# EAGLE board RoPi 2560 (EAGLE 6.5.0)
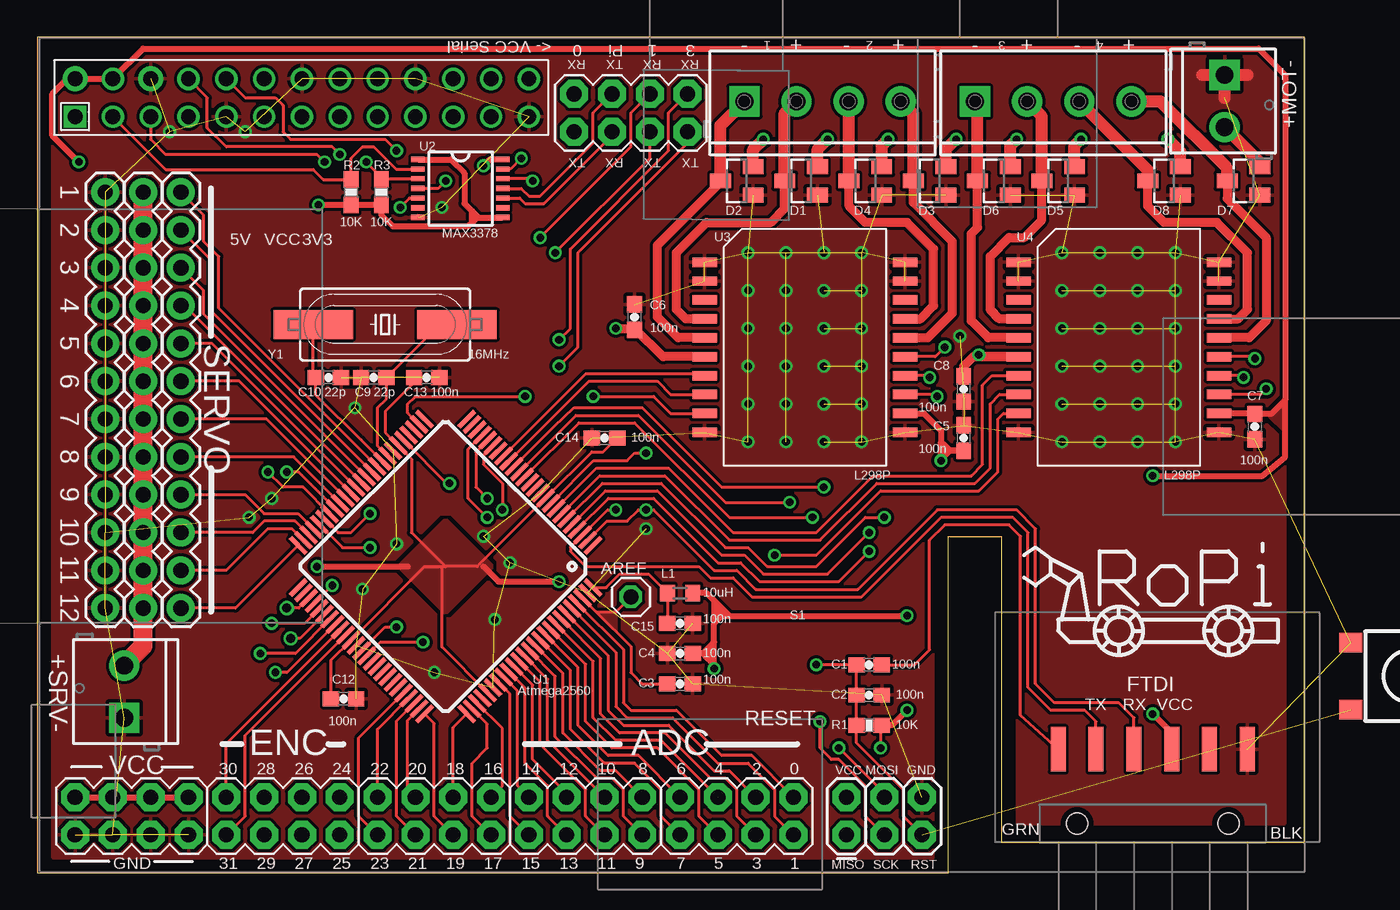
[diagram p0: board, top side]
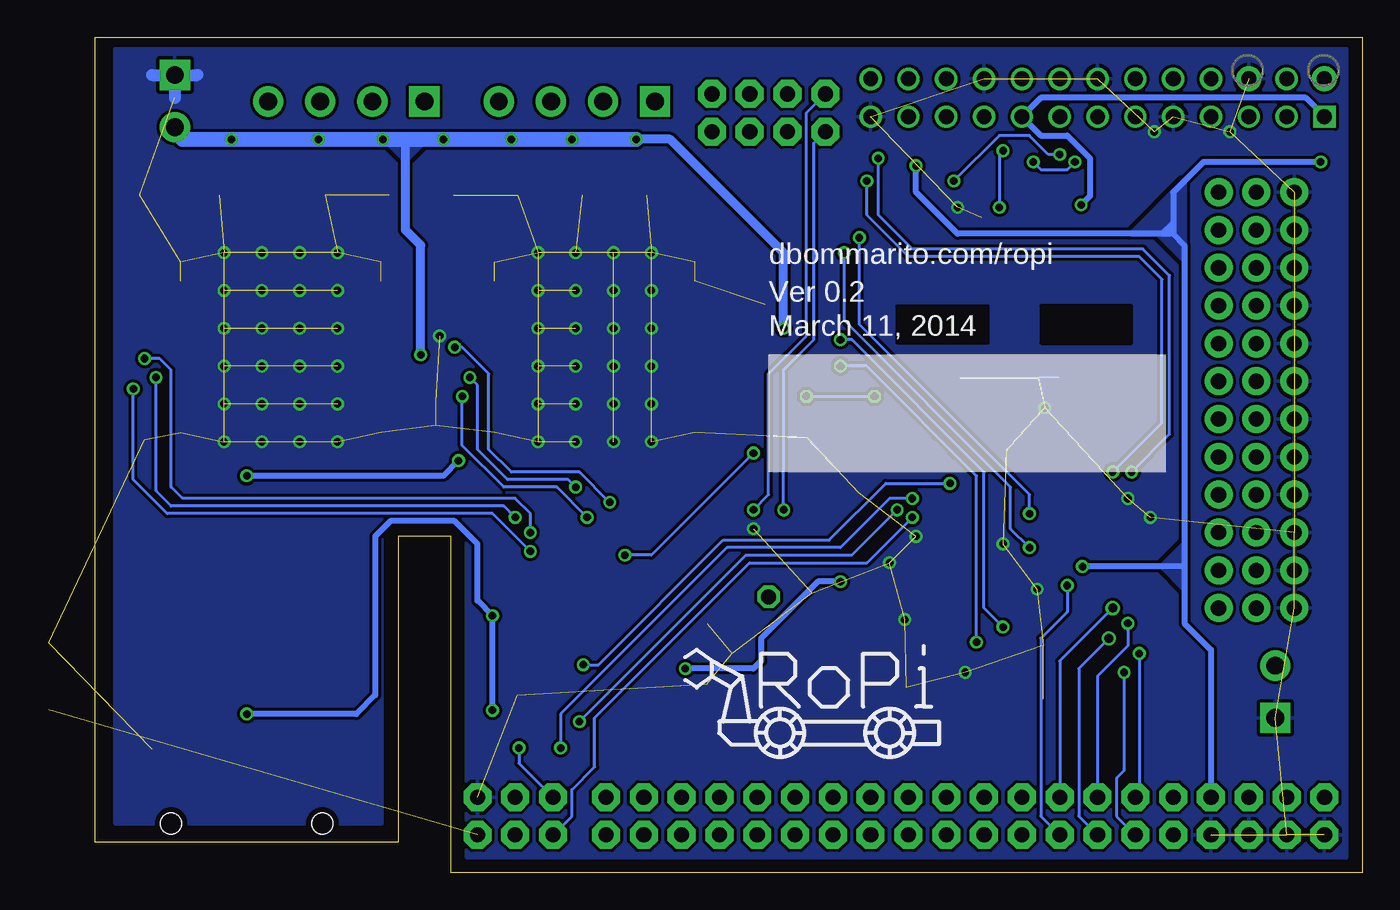
[diagram p1: board, bottom side, seen from below]

Size 85.09 x 56.13 mm. Coordinates in mm from the lower left corner, seen from the top.
Outline: 0,0 61.21,0 61.21,22.61 64.77,22.61 64.77,2.03 85.09,2.03 85.09,56.13 0,56.13 0,0
Copper layers (1*16): Top 0.0356mm / dielectric 1.5011mm / Bottom 0.0356mm
Design rules "OSHPark *": minimum track width 6mil, minimum drill 13mil, track to track 8mil, track to pad 8mil, pad to pad 8mil, via to via 8mil, smd to smd 8mil, copper to edge 15mil, drill to drill 6mil, minimum pad ring 7mil, minimum via ring 7mil, stop-mask expansion 3mil, vias tented up to drill 30mil, thermal gap 10mil

## Footprints (pad centres in the part's own frame; a part is rotated, then mirrored left to right if it is on the bottom)
2X4 = drill 1.016 pad 1.88 octagon: 1 -3.81,-1.27; 2 -3.81,1.27; 3 -1.27,-1.27; 4 -1.27,1.27; 5 1.27,-1.27; 6 1.27,1.27; 7 3.81,-1.27; 8 3.81,1.27
1X01 = drill 1.016 octagon: 1 0,0
0603-CAP = smd 1.1 x 1: 1 -0.85,0; 2 0.85,0
SOT23 = smd 1 x 1.4: 1 -0.95,-1.1; 2 0.95,-1.1; 3 0,1.1
2X3 = drill 1.016 pad 1.88 octagon: 1 0,0; 2 0,2.54; 3 2.54,0; 4 2.54,2.54; 5 5.08,0; 6 5.08,2.54
1X06-SMD = smd 1 x 3: 1 -6.35,5; 2 -3.81,5; 3 -1.27,5; 4 1.27,5; 5 3.81,5; 6 6.35,5 | hole 1.4: -5.08,0; 5.08,0
SCREWTERMINAL-3.5MM-2 = drill 1.2 pad 2.032 square: 1 0,0 | drill 1.2 pad 2.032: 2 3.5,0
SCREWTERMINAL-3.5MM-4 = drill 1.2 pad 2.032 square: 1 0,0 | drill 1.2 pad 2.032: 2 3.5,0; 3 7,0; 4 10.5,0
R0603 = smd 1 x 1.1: 1 -0.85,0; 2 0.85,0
RASPBERRY-PI = drill 1 square: 1 0,0 | drill 1 pad 1.676: 2 0,2.54; 6 5.08,2.54 | drill 1: 3 2.54,0; 4 2.54,2.54; 5 5.08,0; 7 7.62,0; 8 7.62,2.54; 9 10.16,0; 10 10.16,2.54; 11 12.7,0; 12 12.7,2.54; 13 15.24,0; 14 15.24,2.54; 15 17.78,0; 16 17.78,2.54; 17 20.32,0; 18 20.32,2.54; 19 22.86,0; 20 22.86,2.54; 21 25.4,0; 22 25.4,2.54; 23 27.94,0; 24 27.94,2.54; 25 30.48,0; 26 30.48,2.54
0603-RES = smd 1.1 x 1: 1 -0.85,0; 2 0.85,0
TACTILE_SWITCH_TALL = smd 1.55 x 1.3: A1 -3.975,-2.25; A2 3.975,-2.25; B1 -3.975,2.25; B2 3.975,2.25
1X12 = drill 1.016 pad 1.88: 1 0,0; 2 2.54,0; 3 5.08,0; 4 7.62,0; 5 10.16,0; 6 12.7,0; 7 15.24,0; 8 17.78,0; 9 20.32,0; 10 22.86,0; 11 25.4,0; 12 27.94,0
TQFP100 = smd 1.5 x 0.3: 1 -8,6; 2 -8,5.5; 3 -8,5; 4 -8,4.5; 5 -8,4; 6 -8,3.5; 7 -8,3; 8 -8,2.5; 9 -8,2; 10 -8,1.5; 11 -8,1; 12 -8,0.5; 13 -8,0; 14 -8,-0.5; 15 -8,-1; 16 -8,-1.5; 17 -8,-2; 18 -8,-2.5; 19 -8,-3; 20 -8,-3.5; 21 -8,-4; 22 -8,-4.5; 23 -8,-5; 24 -8,-5.5; 25 -8,-6; 51 8,-6; 52 8,-5.5; 53 8,-5; 54 8,-4.5; 55 8,-4; 56 8,-3.5; 57 8,-3; 58 8,-2.5; 59 8,-2; 60 8,-1.5; 61 8,-1; 62 8,-0.5; 63 8,0; 64 8,0.5; 65 8,1; 66 8,1.5; 67 8,2; 68 8,2.5; 69 8,3; 70 8,3.5; 71 8,4; 72 8,4.5; 73 8,5; 74 8,5.5; 75 8,6 | smd 0.3 x 1.5: 26 -6,-8; 27 -5.5,-8; 28 -5,-8; 29 -4.5,-8; 30 -4,-8; 31 -3.5,-8; 32 -3,-8; 33 -2.5,-8; 34 -2,-8; 35 -1.5,-8; 36 -1,-8; 37 -0.5,-8; 38 0,-8; 39 0.5,-8; 40 1,-8; 41 1.5,-8; 42 2,-8; 43 2.5,-8; 44 3,-8; 45 3.5,-8; 46 4,-8; 47 4.5,-8; 48 5,-8; 49 5.5,-8; 50 6,-8; 76 6,8; 77 5.5,8; 78 5,8; 79 4.5,8; 80 4,8; 81 3.5,8; 82 3,8; 83 2.5,8; 84 2,8; 85 1.5,8; 86 1,8; 87 0.5,8; 88 0,8; 89 -0.5,8; 90 -1,8; 91 -1.5,8; 92 -2,8; 93 -2.5,8; 94 -3,8; 95 -3.5,8; 96 -4,8; 97 -4.5,8; 98 -5,8; 99 -5.5,8; 100 -6,8
TSSOP14 = smd 0.9 x 0.35: 1 -2.875,1.95; 2 -2.875,1.3; 3 -2.875,0.65; 4 -2.875,0; 5 -2.875,-0.65; 6 -2.875,-1.3; 7 -2.875,-1.95; 8 2.825,-1.95; 9 2.825,-1.3; 10 2.825,-0.65; 11 2.825,0; 12 2.825,0.65; 13 2.825,1.3; 14 2.825,1.95
POWERSO20 = smd 1.651 x 0.635: 1 -6.731,5.715; 2 -6.731,4.445; 3 -6.731,3.175; 4 -6.731,1.905; 5 -6.731,0.635; 6 -6.731,-0.635; 7 -6.731,-1.905; 8 -6.731,-3.175; 9 -6.731,-4.445; 10 -6.731,-5.715; 11 6.731,-5.715; 12 6.731,-4.445; 13 6.731,-3.175; 14 6.731,-1.905; 15 6.731,-0.635; 16 6.731,0.635; 17 6.731,1.905; 18 6.731,3.175; 19 6.731,4.445; 20 6.731,5.715
HC49UP = smd 5.334 x 1.93: 1 -4.826,0; 2 4.826,0

## Placement (x,y rotation side)
ADC1  M04X2  [2X4]  46.99,3.81 180 top
ADC2  M04X2  [2X4]  36.83,3.81 180 top
AREF  [1X01]  39.88,18.54 0 top
C1  100n  [0603-CAP]  55.88,13.97 0 top
C2  100n  [0603-CAP]  55.88,11.94 0 top
C3  100n  [0603-CAP]  43.18,12.7 180 top
C4  100n  [0603-CAP]  43.18,14.73 180 top
C5  100n  [0603-CAP]  62.23,29.21 270 top
C6  100n  [0603-CAP]  40.13,37.34 90 top
C7  100n  [0603-CAP]  81.79,29.97 90 top
C8  100n  [0603-CAP]  62.23,32.51 270 top
C9  22p  [0603-CAP]  22.61,33.27 180 top
C10  22p  [0603-CAP]  19.56,33.27 0 top
C12  100n  [0603-CAP]  20.57,11.68 0 top
C13  100n  [0603-CAP]  26.16,33.27 0 top
C14  100n  [0603-CAP]  38.1,29.21 180 top
C15  100n  [0603-CAP]  43.18,16.76 0 top
D1  BAS40-04  [SOT23]  51.31,46.48 90 top
D2  BAS40-04  [SOT23]  46.99,46.48 90 top
D3  BAS40-04  [SOT23]  59.94,46.48 90 top
D4  BAS40-04  [SOT23]  55.63,46.48 90 top
D5  BAS40-04  [SOT23]  68.58,46.48 90 top
D6  BAS40-04  [SOT23]  64.26,46.48 90 top
D7  BAS40-04  [SOT23]  81.03,46.48 90 top
D8  BAS40-04  [SOT23]  75.69,46.48 90 top
DIG1  M04X2  [2X4]  26.67,3.81 180 top
J1  AVR_SPI_PRG_6PTH  [2X3]  54.36,2.54 0 top
JP1  [1X06-SMD]  74.93,3.3 0 top
JP2  M023.5MM  [SCREWTERMINAL-3.5MM-2]  79.76,53.59 270 top
JP3  M023.5MM  [SCREWTERMINAL-3.5MM-2]  5.84,10.41 90 top
JP4  [SCREWTERMINAL-3.5MM-4]  47.5,51.82 0 top
JP5  [SCREWTERMINAL-3.5MM-4]  62.99,51.82 0 top
L1  10uH  [R0603]  43.18,18.8 0 top
PI  RASPBERRY-PI  [RASPBERRY-PI]  2.54,50.8 0 top
R1  10K  [0603-RES]  55.88,9.91 0 top
R2  10K  [0603-RES]  21.08,45.72 270 top
R3  10K  [0603-RES]  23.11,45.72 270 top
S1  SWITCH-MOMENTARY-2SMD-4  [TACTILE_SWITCH_TALL]  92.2,13.21 180 top  (outside the outline)
SRV  SrvSig  [1X12]  9.65,45.72 270 top
SRV1  SrvGnd  [1X12]  4.57,45.72 270 top
SRV2  SrvPwr  [1X12]  7.11,45.72 270 top
U1  ATMEGA2560AU  [TQFP100]  27.43,20.57 225 top
U2  MAX3378EEUD  [TSSOP14]  28.45,45.97 0 top
U3  L298_BRIDGE_DRIVER  [POWERSO20]  51.56,35.31 0 top
U4  L298_BRIDGE_DRIVER  [POWERSO20]  72.64,35.31 0 top
U$1  M04X2  [2X4]  39.88,51.05 0 top
U$2  M04X2  [2X4]  6.35,3.81 180 top
U$3  M04X2  [2X4]  16.51,3.81 180 top
Y1  16M  [HC49UP]  23.37,36.83 180 top

## Library data of the parts
ADC1 ADC2 DIG1 J1 JP1-JP5 SRV SRV1 SRV2 U$1-U$3 = SparkFun-Connectors
AREF = pinhead
C1-C10 C12-C15 R1-R3 = SparkFun-Passives
D1-D8 = diode
L1 = dab5267
PI = RaspberryPi
S1 = SparkFun-Electromechanical
U1 = SparkFun-DigitalIC
U2 = max3378e
U3 U4 = SparkFun-PowerIC
Y1 = SparkFun-FreqCtrl

## Nets
3.3V: PI.1 PI.17 R2.2 R3.2 U2.1 U2.8
5V: C4.1 C5.2 C7.2 C12.1 C13.1 C14.1 J1.2 JP1.4 L1.2 PI.2 PI.4 R1.2 U1.10 U1.31 U1.61 U1.80 U2.14 U3.12 U4.12 U$2.1 U$2.3 U$2.5 U$2.7
A0: ADC1.1 U1.97
A1: ADC1.2 U1.96
A2: ADC1.3 U1.95
A3: ADC1.4 U1.94
A4: ADC1.5 U1.93
A5: ADC1.6 U1.92
A6: ADC1.7 U1.91
A7: ADC1.8 U1.90
A8: ADC2.1 U1.89
A9: ADC2.2 U1.88
A10: ADC2.3 U1.87
A11: ADC2.4 U1.86
A12: ADC2.5 U1.85
A13: ADC2.6 U1.84
A14: ADC2.7 U1.83
A15: ADC2.8 U1.82
AREF: AREF.1 C3.2 U1.98
AVR_SCL: U1.43 U2.12
AVR_SDA: U1.44 U2.13
DTR: C1.2 JP1.1
ENC1A: U1.53 U$3.1
ENC1B: U1.54 U$3.2
ENC2A: U1.55 U$3.3
ENC2B: U1.56 U$3.4
ENC3A: U1.57 U$3.5
ENC3B: U1.58 U$3.6
ENC4A: U1.59 U$3.7
ENC4B: U1.60 U$3.8
GND: C2.2 C3.1 C4.2 C5.1 C6.2 C7.1 C8.2 C9.2 C10.2 C12.2 C13.2 C14.2 C15.2 D1.1 D2.1 D3.1 D4.1 D5.1 D6.1 D7.1 D8.1 J1.6 JP1.6 JP2.1 JP3.1 PI.6 PI.9 PI.14 PI.20 PI.25 S1.A2 SRV1.1 SRV1.2 SRV1.3 SRV1.4 SRV1.5 SRV1.6 SRV1.7 SRV1.8 SRV1.9 SRV1.10 SRV1.11 SRV1.12 U1.11 U1.32 U1.62 U1.81 U1.99 U2.7 U3.1 U3.2 U3.10 U3.11 U3.19 U3.20 U4.1 U4.2 U4.10 U4.11 U4.19 U4.20 U$2.2 U$2.4 U$2.6 U$2.8
GPIO0: DIG1.1 U1.78
GPIO1: DIG1.2 U1.77
GPIO2: DIG1.3 U1.76
GPIO3: DIG1.4 U1.75
GPIO4: DIG1.5 U1.74
GPIO5: DIG1.6 U1.73
GPIO6: DIG1.7 U1.72
GPIO7: DIG1.8 U1.71
MISO: J1.1 U1.22
MOSI: J1.4 U1.21
MOT1+: D1.3 JP4.2 U3.4
MOT1-: D2.3 JP4.1 U3.5
MOT1_A: U1.18 U3.7
MOT1_B: U1.27 U3.9
MOT1_PWM: U1.17 U3.8
MOT2+: D3.3 JP4.4 U3.16
MOT2-: D4.3 JP4.3 U3.17
MOT2_A: U1.14 U3.13
MOT2_B: U1.15 U3.15
MOT2_PWM: U1.16 U3.14
MOT3+: D5.3 JP5.2 U4.4
MOT3-: D6.3 JP5.1 U4.5
MOT3_A: U1.8 U4.7
MOT3_B: U1.9 U4.9
MOT3_PWM: U1.7 U4.8
MOT4+: D7.3 JP5.4 U4.16
MOT4-: D8.3 JP5.3 U4.17
MOT4_A: U1.4 U4.13
MOT4_B: U1.5 U4.15
MOT4_PWM: U1.6 U4.14
N$1: JP3.2 SRV2.1 SRV2.2 SRV2.3 SRV2.4 SRV2.5 SRV2.6 SRV2.7 SRV2.8 SRV2.9 SRV2.10 SRV2.11 SRV2.12
N$2: C15.1 L1.1 U1.100
PI_5V_RX: U2.10 U$1.3
PI_5V_TX: U2.11 U$1.4
PI_RX: PI.10 U2.5
PI_SCL: PI.5 R3.1 U2.3
PI_SDA: PI.3 R2.1 U2.2
PI_TX: PI.8 U2.4
RST: C1.1 C2.1 J1.5 R1.1 S1.B2 U1.30
RX0: JP1.3 U1.2 U$1.2
RX1: U1.45 U$1.6
RX3: U1.63 U$1.8
SCK: J1.3 U1.20
SERVO1: SRV.1 U1.35
SERVO2: SRV.2 U1.36
SERVO3: SRV.3 U1.37
SERVO4: SRV.4 U1.38
SERVO5: SRV.5 U1.39
SERVO6: SRV.6 U1.40
SERVO7: SRV.7 U1.41
SERVO8: SRV.8 U1.42
SERVO9: SRV.9 U1.47
SERVO10: SRV.10 U1.48
SERVO11: SRV.11 U1.49
SERVO12: SRV.12 U1.50
TX0: JP1.2 U1.3 U$1.1
TX1: U1.46 U$1.5
TX3: U1.64 U$1.7
V_BATT: C6.1 C8.1 D1.2 D2.2 D3.2 D4.2 D5.2 D6.2 D7.2 D8.2 JP2.2 U3.6 U4.6
XTAL1: C10.1 U1.34 Y1.2
XTAL2: C9.1 U1.33 Y1.1

## Tracks (layer width: path | path; a pad name or v marks a point on that pad's centre or on a via)
3.3V  (via drill 0.51)
  Top 0.406: U2.1 27.77,47.92 28.7,46.99 28.7,44.96 29.21,44.45 | 29.21,44.45 29.64,44.02 | 29.64,44.02 U2.8 | 29.21,43.69 28.96,43.43 23.88,43.43 23.11,44.2 R3.2 R2.2 19.81,44.87 v18.88,44.87 | 29.21,43.69 29.55,44.02 29.64,44.02 | 29.21,43.69 29.21,44.45
  Bottom 0.406: PI.1 3.81,52.07 21.59,52.07 PI.17 21.59,49.53 19.81,49.53 18.29,48.01 18.29,45.47 v18.88,44.87
5V  (via drill 0.51)
  Top 0.203: 27.43,20.57 25.15,22.86 25.15,27.81 U1.31 23.37,29.59 23.37,30.99 25.31,32.93 C13.1 | U1.80 27.18,15.17 27.18,20.57 | 27.43,20.57 26.02,20.57 U1.61 19.72,14.28 C12.1 | 27.43,20.57 29.55,20.57 U1.10 37.25,28.27 38.01,28.27 C14.1 | R1.2 56.64,9.82 v56.64,8.38
  Top 0.406: U4.12 81.75,30.86 C7.2 82.89,30.82 83.82,31.75 | 83.82,31.75 83.82,53.59 82.04,55.37 7.11,55.37 PI.4 PI.2 2.03,53.34 1.02,52.32 1.02,49.53 v2.79,47.75 | U3.12 59.56,30.86 60.71,29.72 60.71,28.96 | 60.96,28.7 61.3,28.36 | 61.3,28.36 C5.2 61.38,28.36 arc90 v60.71,27.69 | 61.3,28.36 60.71,27.76 v60.71,27.69 | v60.71,27.69 60.71,28.96 | 60.71,28.96 60.96,28.7 | 60.96,28.7 60.96,28.19 | v74.93,26.67 82.3,26.67 83.82,27.94 83.82,31.75 | 45.47,18.29 44.96,18.8 L1.2 | 45.47,18.29 45.47,17.53 | 45.47,17.53 45.47,16.76 | 45.47,15.49 45.21,15.24 | 44.96,14.99 44.7,14.73 | 45.47,15.49 45.47,16.76 | 45.47,16.76 45.72,17.02 | 45.97,17.27 46.48,17.27 | 46.48,17.27 v58.42,17.27 | 46.48,17.27 45.72,18.03 | 45.47,18.29 45.72,18.03 | 45.72,18.03 45.72,17.02 | 45.72,17.02 45.97,17.27 | 45.97,17.27 45.97,17.53 45.47,17.53 | v74.93,10.67 76.2,9.4 JP1.4 | v45.47,13.72 45.47,13.97 | 45.47,13.97 45.47,15.49 | 29.97,20.57 30.99,19.56 v35.05,19.56 | 44.7,14.73 44.96,14.48 | 44.96,14.48 45.21,14.22 | 45.47,13.97 45.21,14.22 | 45.21,14.22 45.21,15.24 | 45.21,15.24 44.96,14.99 | 44.96,14.99 44.96,14.48 | U$2.7 U$2.5 U$2.3 U$2.1 | v18.8,20.57 24.89,20.57 | U2.14 30.4,47.92 v29.97,47.5 | v58.42,10.92 57.4,9.91 R1.2 | 44.7,14.73 C4.1
  Bottom 0.203: v56.64,8.38 56.64,7.37 J1.2
  Bottom 0.406: v60.71,27.69 61.72,26.67 v74.93,26.67 | v58.42,10.92 v58.42,17.27 59.44,18.29 59.44,22.1 60.96,23.62 65.28,23.62 66.29,22.61 66.29,11.94 67.56,10.67 v74.93,10.67 | v35.05,19.56 36.58,19.56 40.39,15.75 40.39,14.22 40.89,13.72 v45.47,13.72 | 12.7,42.93 11.94,42.16 11.94,20.57 | 11.94,20.57 11.94,16.76 10.16,14.99 U$2.1 | 11.94,20.57 v18.8,20.57 | 12.7,42.93 12.95,42.93 | 13.46,42.93 27.18,42.93 29.97,45.72 v29.97,47.5 | v2.79,47.75 10.67,47.75 12.7,45.72 12.7,43.69 | 12.7,43.69 12.7,42.93 | 12.7,43.69 13.46,42.93 | 13.46,42.93 12.95,42.93 | 12.95,42.93 12.95,43.18
  pour Top: 82.8,30.73 83.82,29.72 83.82,31.5 83.82,31.75
  pour Bottom: 11.94,46.48 15.49,42.93 13.72,42.93 11.94,41.15
  pour Bottom: 13.46,20.57 11.94,22.1 11.94,19.05
  pour Top: 27.43,23.62 24.38,20.57 27.43,17.53 30.48,20.57
A0
  Top 0.203: ADC1.1 48.01,7.87 45.97,7.87 42.93,10.92 39.88,10.92 39.37,11.43 39.37,15 U1.97
A1
  Top 0.203: U1.96 38.86,14.8 38.86,11.18 39.62,10.41 42.67,10.41 45.72,7.37 47.75,7.37 49.53,5.59 49.53,3.81 ADC1.2
A2
  Top 0.203: U1.95 38.35,14.6 38.35,10.92 39.37,9.91 42.42,9.91 45.47,6.86 46.48,6.86 ADC1.3
A3
  Top 0.203: ADC1.4 46.99,3.81 46.99,5.59 46.23,6.35 45.21,6.35 42.16,9.4 39.12,9.4 37.85,10.67 37.85,14.4 U1.94
A4  (1 unrouted)
  Top 0.203: 45.72,5.06 41.91,8.89 38.86,8.89 37.34,10.41 37.34,14.2 U1.93
A5
  Top 0.203: ADC1.6 44.45,3.81 44.45,5.59 41.66,8.38 38.61,8.38 36.83,10.16 36.83,14 U1.92
A6
  Top 0.203: ADC1.7 40.39,7.87 38.35,7.87 36.32,9.91 36.32,13.8 U1.91
A7
  Top 0.203: ADC1.8 41.91,3.81 41.91,5.59 40.13,7.37 38.1,7.37 35.81,9.65 35.81,13.61 U1.90
A8
  Top 0.203: ADC2.1 38.86,6.86 37.85,6.86 35.31,9.4 35.31,13.41 U1.89
A9
  Top 0.203: ADC2.2 39.37,3.81 39.37,5.59 38.61,6.35 37.59,6.35 34.8,9.14 34.8,13.21 U1.88
A10
  Top 0.203: ADC2.3 34.29,8.89 34.29,13.01 U1.87
A11
  Top 0.203: ADC2.4 36.83,3.81 36.83,5.59 33.78,8.64 33.78,12.81 U1.86
A12
  Top 0.203: ADC2.5 35.56,5.33 33.27,7.62 33.27,12.61 U1.85
A13
  Top 0.203: ADC2.6 34.29,3.81 34.29,5.84 32.77,7.37 32.77,12.41 U1.84
A14
  Top 0.203: ADC2.7 32.26,5.84 32.26,12.21 U1.83
A15
  Top 0.203: ADC2.8 31.75,3.81 31.75,12.01 U1.82
AREF
  Top 0.203: 37.55,17.53 39.88,15.2 39.88,13.46 40.64,12.7 C3.2 | U1.98 37.55,17.53 | AREF.1 38.86,17.53 37.55,17.53
  pour Top: 37.59,17.53 38.86,17.53 38.86,16.26
AVR_SCL  (via drill 0.51)
  Top 0.203: U1.43 17.55,26.92 v16.76,26.92 | v33.27,46.48 33.16,46.62 U2.12
  Bottom 0.203: v16.76,26.92 13.46,30.23 13.46,39.88 14.99,41.4 30.48,41.4 33.27,44.2 v33.27,46.48
AVR_SDA  (via drill 0.51)
  Top 0.203: U1.44 17.86,25.91 16.51,25.91 v15.49,26.92 | v32.51,48.01 31.78,47.27 U2.13
  Bottom 0.203: v15.49,26.92 12.95,29.46 12.95,40.13 14.73,41.91 30.23,41.91 32.51,44.2 v32.51,48.01
DTR
  Top 0.203: JP1.1 66.04,10.59 66.04,22.61 65.28,23.37 60.96,23.37 59.94,22.35 59.94,14.99 58.93,13.97 C1.2
ENC1A  (via drill 0.6)
  Top 0.203: U1.53 17.57,17.78 v16.76,17.78
  Bottom 0.203: v16.76,17.78 20.32,14.22 U$3.1
ENC1B  (via drill 0.51)
  Top 0.203: U1.54 19.8,19.3 v19.81,19.3
  Bottom 0.203: v19.81,19.3 19.81,17.53 21.59,15.75 21.59,3.81 U$3.2
ENC2A  (via drill 0.51)
  Top 0.203: U1.55 17.96,16.76 v15.75,16.76
  Bottom 0.203: v15.75,16.76 15.75,15.24 17.78,13.21 U$3.3
ENC2B  (via drill 0.6)
  Top 0.203: U1.56 17.66,15.75 v17.02,15.75
  Bottom 0.203: v17.02,15.75 19.05,13.72 19.05,3.81 U$3.4
ENC3A  (via drill 0.51)
  Top 0.203: U1.57 17.35,14.73 v14.99,14.73
  Bottom 0.203: v14.99,14.73 14.99,5.33 U$3.5
ENC3B  (via drill 0.51)
  Top 0.203: U1.58 16.78,13.46 v16,13.46
  Bottom 0.203: v16,13.46 16,6.86 16.51,6.35 16.51,3.81 U$3.6
ENC4A
  Top 0.203: U$3.7 12.7,8.67 U1.59
ENC4B
  Top 0.203: U$3.8 13.97,3.81 13.97,9.23 U1.60
GND  (via drill 0.51)  (126 unrouted)
  Top 0.813: JP2.1 78.23,53.59 | 81.28,53.59 JP2.1 | 79.76,52.07 JP2.1
  Bottom 0.813: JP2.1 78.23,53.59 | 81.28,53.59 JP2.1 | JP2.1 79.76,52.07
  other vias: 61.98,36.07 47.75,41.66 50.29,41.66 52.83,41.66 55.37,41.66 55.37,39.12 52.83,39.12 50.29,39.12 47.75,39.12 47.75,36.58 50.29,36.58 52.83,36.58 55.37,36.58 55.37,34.04 52.83,34.04 50.29,34.04 47.75,34.04 47.75,31.5 50.29,31.5 52.83,31.5 55.37,31.5 55.37,28.96 52.83,28.96 50.29,28.96 47.75,28.96 68.83,28.96 71.37,28.96 73.91,28.96 76.45,28.96 76.45,31.5 73.91,31.5 71.37,31.5 68.83,31.5 68.83,34.04 71.37,34.04 73.91,34.04 76.45,34.04 76.45,36.58 73.91,36.58 71.37,36.58 68.83,36.58 68.83,39.12 71.37,39.12 73.91,39.12 76.45,39.12 76.45,41.66 73.91,41.66 71.37,41.66 68.83,41.66 29.97,22.61 24.13,22.1 21.34,31.24 27.18,44.7 13.97,49.78 8.89,49.78 14.22,23.88 15.75,25.15 40.89,23.11 21.84,19.05 26.67,13.46 30.73,17.02 31.75,20.83
  pour Bottom (isolate 0, rank 6): 1.02,55.37 83.82,55.37 83.82,3.3 65.79,3.3 65.79,23.37 60.2,23.37 60.2,1.02 1.02,1.02
  pour Top (isolate 0, rank 6): 1.02,55.37 1.02,1.02 60.2,1.02 60.2,23.37 65.79,23.37 65.79,3.3 83.82,3.3 83.82,55.37
GPIO0
  Top 0.203: DIG1.1 31.24,5.84 31.24,9.69 U1.78
GPIO1
  Top 0.203: DIG1.2 29.21,3.81 29.21,7.37 30.23,8.38 30.23,10 U1.77
GPIO2
  Top 0.203: DIG1.3 27.94,9.77 U1.76
GPIO3
  Top 0.203: DIG1.4 26.67,3.81 26.67,10.02 U1.75
GPIO4
  Top 0.203: DIG1.5 24.89,5.59 24.89,10.26 U1.74
GPIO5
  Top 0.203: DIG1.6 24.13,3.81 24.13,10.2 U1.73
GPIO6
  Top 0.203: DIG1.7 22.86,9.64 U1.72
GPIO7
  Top 0.203: DIG1.8 21.59,3.81 21.59,9.07 U1.71
MISO  (via drill 0.51)
  Top 0.203: v30.23,23.88 28.96,25.15 28.96,28.46 U1.22
  Bottom 0.203: J1.1 53.09,3.81 53.09,5.59 51.56,7.11 51.56,10.41 41.15,20.83 33.27,20.83 v30.23,23.88
MOSI  (via drill 0.51)
  Top 0.203: U1.21 29.46,28.26 29.46,25.91 v30.23,25.15 | v53.85,8.38 56.9,5.33 J1.4
  Bottom 0.203: v30.23,25.15 31.75,25.15 35.05,21.84 42.67,21.84 53.85,10.67 v53.85,8.38
MOT1+
  Top 0.61: U3.4 43.56,37.21 42.93,37.85 42.93,41.66 44.96,43.69 49.28,43.69 50.21,44.62 D1.3
  Top 0.813: D1.3 50.21,51.03 JP4.2
MOT1-
  Top 0.61: U3.5 43.05,35.94 41.66,37.34 41.66,42.16 45.89,46.4
  Top 0.813: JP4.1 45.89,50.21 D2.3 45.89,46.4
MOT1_A
  Top 0.203: U1.18 36.85,33.53 44.7,33.53 U3.7
MOT1_B  (via drill 0.51)
  Top 0.203: U1.27 24.89,30.89 24.89,31.5 25.4,32 v32.77,32 | v37.34,32 41.4,32 42.55,30.86 U3.9
  Bottom 0.203: v32.77,32 v37.34,32
MOT1_PWM
  Top 0.203: U1.17 37.05,33.02 41.66,33.02 42.55,32.13 U3.8
MOT2+
  Top 0.61: U3.16 59.82,35.94 61.47,37.59 61.47,42.42 58.84,45.04 D3.3
  Top 0.813: D3.3 58.84,50.97 JP4.4
MOT2-
  Top 0.61: U3.17 59.31,37.21 60.2,38.1 60.2,41.91 58.42,43.69 55.63,43.69 54.53,44.79 D4.3
  Top 0.813: D4.3 54.53,51.79 JP4.3
MOT2_A  (via drill 0.51)
  Top 0.203: U1.14 36.38,30.23 40.13,30.23 46.48,23.88 v52.07,23.88 | v60.45,32 60.33,32.13 U3.13
  Bottom 0.203: v52.07,23.88 54.1,25.91 57.66,25.91 60.45,28.7 v60.45,32
MOT2_B  (via drill 0.51)
  Top 0.203: U1.15 36.18,30.73 40.39,30.73 46.23,24.89 v50.55,24.89 | v60.96,35.31 60.33,34.67 U3.15
  Bottom 0.203: v50.55,24.89 52.58,26.92 57.15,26.92 58.67,28.45 58.67,33.53 60.45,35.31 v60.96,35.31
MOT2_PWM  (via drill 0.51)
  Top 0.203: U1.16 34.71,29.97 36.07,31.24 40.64,31.24 45.97,25.91 v52.83,25.91 | v59.94,33.27 59.82,33.4 U3.14
  Bottom 0.203: v52.83,25.91 53.34,26.42 57.4,26.42 59.44,28.45 59.44,32.77 v59.94,33.27
MOT3+
  Top 0.61: U4.4 64.64,37.21 64.01,37.85 64.01,41.4 65.28,42.67 66.29,42.67 67.48,43.86 D5.3
  Top 0.813: D5.3 67.48,50.83 JP5.2
MOT3-
  Top 0.61: U4.5 63.88,35.94 62.74,37.08 62.74,42.93 63.16,43.35 D6.3
  Top 0.813: D6.3 63.16,51.65 JP5.1
MOT3_A
  Top 0.203: U1.8 37.57,27.18 42.42,27.18 46.74,22.86 52.32,22.86 56.13,26.67 62.74,26.67 63.5,27.43 63.5,32.77 64.14,33.4 U4.7
MOT3_B  (via drill 0.51)
  Top 0.203: U1.9 37.37,27.69 39.62,27.69 40.13,28.19 v40.89,28.19 | v49.53,21.34 52.32,21.34 56.64,25.65 63.25,25.65 64.52,26.92 64.52,30.48 64.9,30.86 U4.9
  Bottom 0.203: v40.89,28.19 47.75,21.34 v49.53,21.34
MOT3_PWM
  Top 0.203: U1.7 37.77,26.67 42.16,26.67 46.48,22.35 52.58,22.35 56.39,26.16 62.99,26.16 64.01,27.18 64.01,31.5 64.64,32.13 U4.8
MOT4+
  Top 0.61: D7.3 79.93,45.3 82.55,42.67 82.55,37.08 81.41,35.94 U4.16
  Top 0.813: D7.3 79.93,47.33 75.44,51.82 JP5.4
MOT4-
  Top 0.61: U4.17 80.64,37.21 81.28,37.85 81.28,41.66 79.25,43.69 75.69,43.69 74.59,44.79 D8.3
  Top 0.813: D8.3 74.59,47.22 JP5.3
MOT4_A  (via drill 0.51)
  Top 0.203: U1.4 38.37,25.15 41.4,25.15 45.72,20.83 47.24,20.83 48.51,19.56 53.85,19.56 v55.88,21.59 | v82.55,32.51 82.17,32.13 U4.13
  Bottom 0.203: v55.88,21.59 58.42,24.13 80.26,24.13 82.55,26.42 v82.55,32.51
MOT4_B  (via drill 0.51)
  Top 0.203: U1.5 38.17,25.65 41.66,25.65 45.97,21.34 47.5,21.34 48.77,20.07 53.09,20.07 v55.88,22.86 | v81.79,34.54 81.66,34.67 U4.15
  Bottom 0.203: v55.88,22.86 55.88,24.13 56.9,25.15 79.25,25.15 80.01,25.91 80.01,33.78 80.77,34.54 v81.79,34.54
MOT4_PWM  (via drill 0.51)
  Top 0.203: U1.6 37.97,26.16 41.91,26.16 46.23,21.84 47.75,21.84 49.02,20.57 52.32,20.57 55.63,23.88 v56.9,23.88 | v81.03,33.27 80.9,33.4 U4.14
  Bottom 0.203: v56.9,23.88 57.66,24.64 80.01,24.64 81.03,25.65 v81.03,33.27
N$1
  Top 1.27: SRV2.1 SRV2.2 SRV2.3 SRV2.4 SRV2.5 SRV2.6 SRV2.7 SRV2.8 SRV2.9 SRV2.10 SRV2.11 SRV2.12 7.11,15.24 5.84,13.97 JP3.2
N$2
  Top 0.203: C15.1 L1.1 41.06,20.07 39.12,20.07 38.21,19.16 U1.100
PI_5V_RX
  Top 0.203: U2.10 32.4,45.32 32.77,44.96 34.04,44.96 38.61,49.53 U$1.3
PI_5V_TX
  Top 0.203: U2.11 32.51,45.97 33.02,45.47 33.78,45.47 37.34,49.02 37.34,51.05 U$1.4
PI_RX  (via drill 0.51)
  Top 0.203: PI.10 13.97,52.07 16,52.07 16.51,51.56 16.51,49.78 17.02,49.28 23.37,49.28 v24.13,48.51 | v24.38,44.7 25,45.32 U2.5
  Bottom 0.203: v24.13,48.51 24.38,48.26 v24.38,44.7
PI_SCL  (via drill 0.51)
  Top 0.203: U2.3 23.68,46.62 R3.1 23.11,46.74 v22.1,47.75 | v19.3,47.75 18.8,48.26 8.64,48.26 7.62,49.28 PI.5
  Bottom 0.203: v22.1,47.75 21.59,47.24 19.81,47.24 v19.3,47.75
PI_SDA
  Top 0.203: U2.2 24.1,47.27 22.61,48.77 21.84,48.77 21.08,48.01 R2.1 19.22,46.57 18.54,47.24 8.64,47.24 PI.3
PI_TX  (via drill 0.51)
  Top 0.203: PI.8 11.43,52.07 11.43,50.04 12.7,48.77 19.81,48.77 v20.32,48.26 | v27.43,46.48 26.92,45.97 U2.4
  Bottom 0.203: v20.32,48.26 21.08,48.26 22.35,49.53 24.38,49.53 v27.43,46.48
RST  (via drill 0.51)  (1 unrouted)
  Top 0.203: v52.32,13.97 C1.1 C2.1 R1.1 55.03,8.72 58.17,5.59 58.17,3.81 J1.5 | U1.30 27.5,26.16 v27.69,26.16
  Bottom 0.203: v52.32,13.97 51.31,13.97 42.93,22.35 35.81,22.35 32,26.16 v27.69,26.16
RX0  (via drill 0.51)
  Top 0.203: U1.2 38.26,23.62 39.62,23.62 40.39,24.38 v40.89,24.38 41.4,24.38 45.47,20.32 46.99,20.32 48.26,19.05 55.12,19.05 60.45,24.38 65.79,24.38 67.06,23.11 67.06,12.7 68.33,11.43 72.64,11.43 73.66,10.41 JP1.3
  Bottom 0.203: v40.89,24.38 39.88,25.4 39.88,33.53 37.34,36.07 37.34,51.05 U$1.2
RX1  (via drill 0.51)
  Top 0.203: U1.45 20.2,22.86 21.08,22.86 v22.35,24.13 | v33.78,42.67 39.88,48.77 39.88,51.05 U$1.6
  Bottom 0.203: v22.35,24.13 22.35,25.4 33.78,36.83 v33.78,42.67
RX3  (via drill 0.51)
  Top 0.203: U1.63 23.37,16.51 v24.13,16.51 | v35.05,35.81 35.81,36.58 35.81,41.91 42.42,48.51 42.42,51.05 U$1.8
  Bottom 0.203: v24.13,16.51 25.4,17.78 25.4,26.92 34.29,35.81 v35.05,35.81
SCK  (via drill 0.51)
  Top 0.203: J1.3 55.63,3.81 55.63,5.84 53.85,7.62 53.34,7.62 52.58,8.38 v52.58,10.16 | U1.20 29.97,28.06 29.97,27.43 31.24,26.16 v31.24,24.38
  Bottom 0.203: v52.58,10.16 41.4,21.34 34.29,21.34 v31.24,24.38
SERVO1
  Top 0.203: U1.35 12.19,37.94 12.19,41.4 11.18,42.42 11.18,44.2 SRV.1
SERVO2
  Top 0.203: SRV.2 11.68,41.15 11.68,37.74 U1.36
SERVO3
  Top 0.203: U1.37 11.18,37.54 11.18,39.12 SRV.3
SERVO4
  Top 0.203: U1.38 9.91,38.1 SRV.4
SERVO5
  Top 0.203: U1.39 11.74,35.56 SRV.5
SERVO6
  Top 0.203: U1.40 13.57,33.02 SRV.6
SERVO7
  Top 0.203: U1.41 15.4,30.48 SRV.7
SERVO8
  Top 0.203: U1.42 17.24,27.94 SRV.8
SERVO9
  Top 0.203: SRV.9 13.97,25.4 15.24,24.13 17.51,24.13 U1.47
SERVO10
  Top 0.203: U1.48 17.31,23.62 15.24,23.62 14.48,22.86 SRV.10
SERVO11
  Top 0.203: U1.49 17.11,23.11 15.49,23.11 12.7,20.32 SRV.11
SERVO12
  Top 0.203: U1.50 13.32,17.78 SRV.12
TX0  (via drill 0.51)
  Top 0.203: JP1.2 71.12,10.16 70.36,10.92 68.07,10.92 66.55,12.45 66.55,22.86 65.53,23.88 60.71,23.88 55.37,18.54 48.01,18.54 46.74,19.81 45.21,19.81 44.45,20.57 36.83,20.57 35.81,21.59 35.81,21.89 U1.3 38.31,24.38 v38.86,24.38
  Bottom 0.203: v38.86,24.38 38.86,33.78 36.83,35.81 36.83,49.02 U$1.1
TX1  (via drill 0.51)
  Top 0.203: U1.46 20.5,21.84 v22.35,21.84 | v34.8,41.66 41.15,48.01 U$1.5
  Bottom 0.203: v22.35,21.84 23.62,23.11 23.62,25.91 34.8,37.08 v34.8,41.66
TX3  (via drill 0.51)
  Top 0.203: U1.64 23.06,15.49 v25.91,15.49 | v35.05,34.04 36.32,35.31 36.32,41.66 43.69,49.02 U$1.7
  Bottom 0.203: v25.91,15.49 25.91,26.67 33.27,34.04 v35.05,34.04
V_BATT  (via drill 0.51)
  Top 0.61: v38.86,36.58 40.13,36.58 42.04,34.67 U3.6 | C8.1 62.23,34.04 62.87,34.67 U4.6 63.37,34.67 v63.25,34.8
  Top 0.813: D5.2 69.68,48.85 v70.1,49.28 | D3.2 61.04,48.6 v61.72,49.28 | D4.2 56.73,48.85 v57.15,49.28 | D1.2 52.41,48.6 v53.09,49.28 | D2.2 48.09,48.6 v48.77,49.28 | D8.2 76.79,48.43 v75.95,49.28 | D6.2 65.36,48.85 v65.79,49.28 | 40.13,36.58 C6.1 | D7.2 82.13,47.72 JP2.2
  Bottom 0.61: v38.86,36.58 38.86,41.66 46.48,49.28 v48.77,49.28 | v63.25,34.8 63.25,42.16 64.26,43.18 64.26,49.28
  Bottom 1.016: v48.77,49.28 v53.09,49.28 v57.15,49.28 v61.72,49.28 64.26,49.28 v65.79,49.28 v70.1,49.28 v75.95,49.28 79.25,49.28 79.76,49.78 JP2.2
  pour Bottom: 64.26,48.01 62.99,49.28 65.53,49.28
XTAL1
  Top 0.203: U1.34 21.76,29.08 18.8,32 18.71,32.09 C10.1 18.54,33.44 Y1.2 18.71,37.25
XTAL1_CLR
  cutout Bottom: 15.49,38.1 21.59,38.1 21.59,35.56 15.49,35.56
XTAL2
  Top 0.203: U1.33 22.86,28.68 22.86,31.24 23.46,31.84 C9.1 27.01,36.83 Y1.1
XTAL2_CLR
  cutout Bottom: 25.15,38.1 25.15,35.56 31.24,35.56 31.24,38.1

## Text on the board
tPlace: <- VCC Serial | 0 | Pi | 1 | 3 | 1 | 2 | 3 | 4 | RX | TX | RX | RX | - | + | - | + | - | + | - | + | +MOT- | U2 | TX | RX | TX | TX | R2 | R3 | 1 | 2 | D2 | D1 | D4 | D3 | D6 | D5 | D8 | D7 | 10K | 10K | MAX3378 | 5V | VCC | 3V3 | U3 | U4 | 3 | 4 | C6 | 5 | SERVO | 100n | Y1 | 16MHz | 6 | C8 | C10 | 22p | C9 | 22p | C13 | 100n | C7 | 7 | 100n | C5 | C14 | 100n | 8 | 100n | 100n | 9 | L298P | L298P | 10 | 11 | AREF | L1 | 12 | 10uH | 100n | S1 | C15 | +SRV- | C4 | 100n | C1 | 100n | C12 | U1 | 100n | Atmega2560 | C3 | C2 | 100n | FTDI | TX | RX | VCC | 100n | RESET | R1 | 10K | ENC | ADC | VCC | 30 | 28 | 26 | 24 | 22 | 20 | 18 | 16 | 14 | 12 | 10 | 8 | 6 | 4 | 2 | 0 | VCC | MOSI | GND | GRN | BLK | GND | 31 | 29 | 27 | 25 | 23 | 21 | 19 | 17 | 15 | 13 | 11 | 9 | 7 | 5 | 3 | 1 | MISO | SCK | RST
bPlace: dbommarito.com/ropi | Ver 0.2 | March 11, 2014